# Altium PCB customPCB.PcbDoc
Units mil, origin at the board's own origin, x right, y up, seen from the top; angles counter-clockwise.
Board outline 3105.44 x 1253.03 mil, 2 copper layers (Top Layer, Bottom Layer); 62 components, 39 nets, 215 pads, 57 vias.
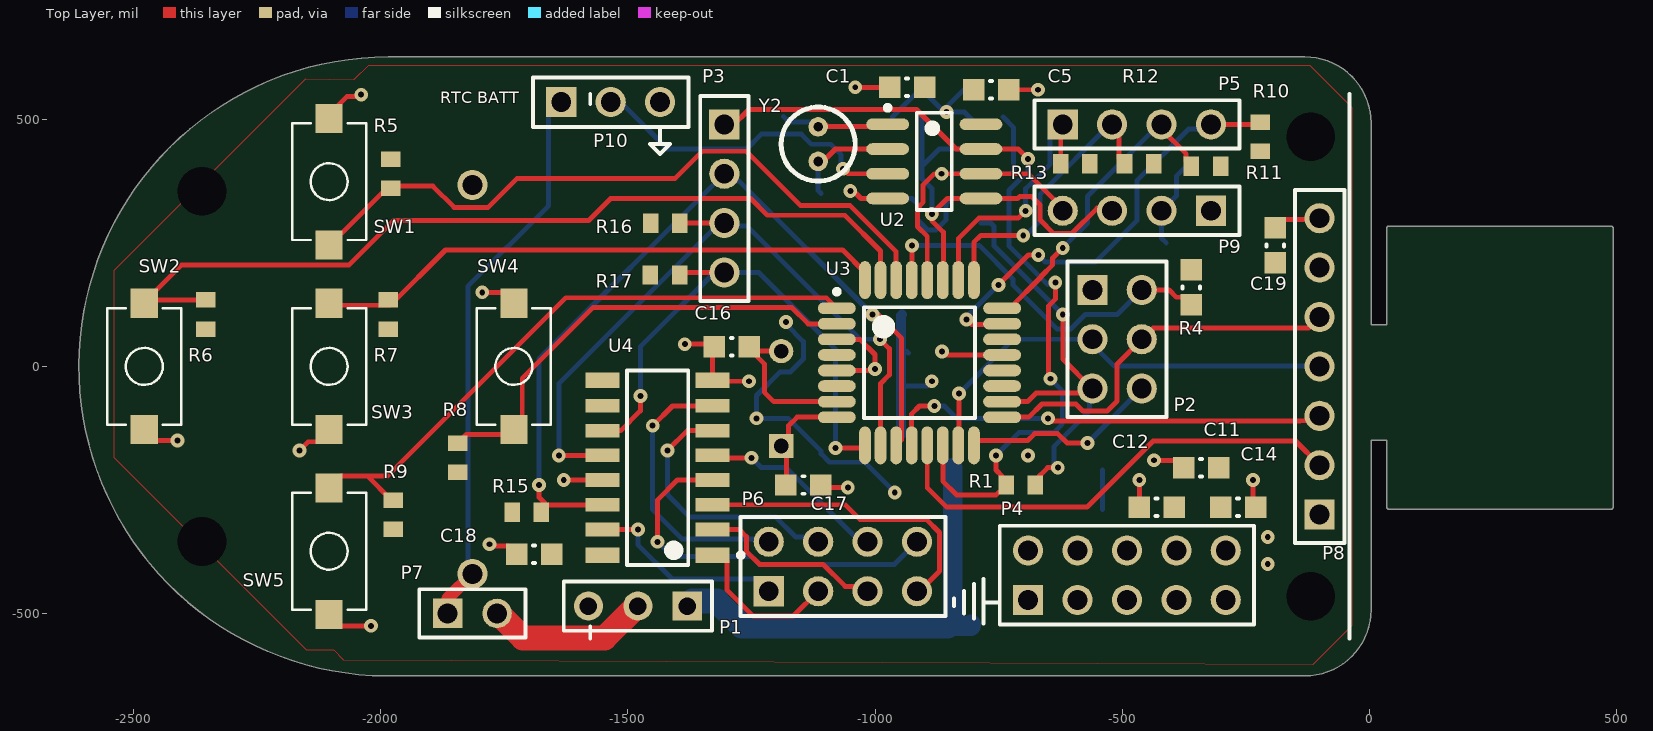
[diagram p0: Top Layer view]
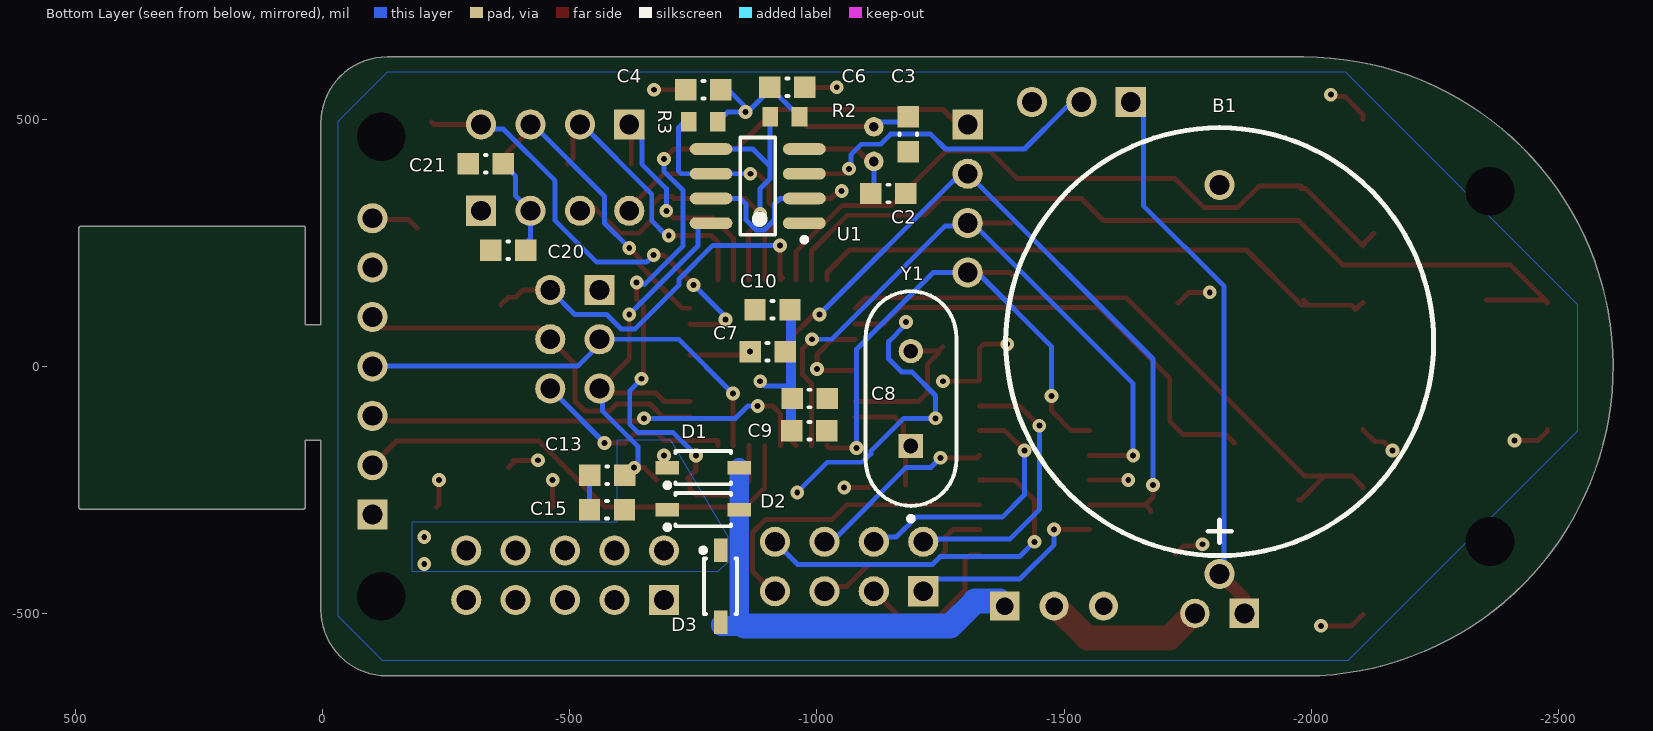
[diagram p1: Bottom Layer view, seen from below]

## Layer stack, top to bottom
Top Solder: solder mask 0.4, Solder Resist, Dk 3.5
Top Layer: signal copper 1.4
Dielectric 1: dielectric 12.6, FR-4, Dk 4.8
Bottom Layer: signal copper 1.4
Bottom Solder: solder mask 0.4, Solder Resist, Dk 3.5

## Board outline
-1990,-626.51 -130,-626.51 ccw(c-130,-622.5) -129.82,-626.51 ccw(c-130,-492.5) 4.01,-492.68 ccw(c0,-492.5) 4.02,-492.5 4.02,-149.02 35.98,-149.02 35.98,-285 ccw(c40,-285) 40,-289.01 490,-289.01 ccw(c490,-285) 494.02,-285 494.02,280 ccw(c490,280) 490,284.02 40,284.02 ccw(c40,280) 35.98,280 35.98,84.02 4.02,84.02 4.02,492.5 ccw(c0,492.5) 4.01,492.68 ccw(c-130,492.5) -129.82,626.51 ccw(c-130,622.5) -130,626.52 -1983.16,626.52 ccw(c-1983.16,622.5) -1984.05,626.42 ccw(c-1984.93,622.5) -1984.93,626.51 ccw(c-1984.93,0.01) -1990.59,-626.47 ccw(c-1990,-622.5)

## Design rules (kind name [scope] priority, off if disabled: settings)
Clearance [All] p1: gap=10 ignorepadtopadclearanceinfootprint=FALSE except(0: Arc-Hole Track-Hole SMDPad-Hole THPad-Hole Via-Hole Fill-Hole Poly-Hole Region-Hole Text-Hole; 2: Arc-SMDPad Track-SMDPad SMDPad-SMDPad)
HoleSize [All] p1: absolutevalues=TRUE maxlimit=100 minlimit=11.81 maxpercent=80.000 minpercent=20.000
PolygonConnect [All] p1: connectstyle=Direct reliefconductorwidth=10 reliefentries=4 polygonreliefangle="90 Angle" airgapwidth=10
RoomDefinition UI [InComponentClass('UI')] p1: confinementstyle=ConfineOut formatcopy=TRUE lockcomponents=FALSE outline 410,-3132.5 545,-3132.5 545,-2712.5 410,-2712.5
RoomDefinition Atmega328p_custom_board [InComponentClass('Atmega328p_custom_board')] p2: confinementstyle=ConfineOut formatcopy=TRUE lockcomponents=FALSE outline 95,-3532.5 440,-3532.5 440,-3112.5 95,-3112.5
RoutingVias [All] p1: holewidth=28 width=50 viastyle="Through Hole" minholewidth=11.81 minwidth=7.99 maxholewidth=28 maxwidth=50
SilkToSilkClearance [All] p1: silktosilkclearance=1.97
SilkToSolderMaskClearance [IsPad] p1: minsilkscreentomaskgap=3.94 clearancetoexposedcopper=TRUE
SolderMaskExpansion [All] p1: expansion=4
Width [All] p1: maxlimit=50 minlimit=10 preferedwidth=10 minimp=50.000000 maximp=50.000000 favimp=50.000000
27 further rules are at their usual default settings.

## Classes and differential pairs
component class UI: C18 C19 C20 C21 C? P8 P9 R5 R6 R7 R8 R9 R? SW1 SW2 SW3 SW4 SW5 SW?
component class Atmega328p_custom_board: B1 C1 C2 C3 C4 C5 C6 C7 C8 C9 C10 C11 C12 C13 C14 C15 C16 C17 C? D1 D2 D3 P1 P2 P3 P4 P5 P6 P7 P10 R1 R2 R3 R4 R10 R11 R12 R13 R15 R16 R17 R? U1 U2 U3 U4 U? Y1 Y2 Y?

## Components (designator, comment, footprint, x,y, rotation, side; value= is the part's Value field where it differs from the comment)
B1 "2032_holder" 2032_BATTERY_HOLDER -1815,-419.9 r90 bottom
C1 "1uF" CAPC0603(1608)100_M -935,565 r180 top value=20pF
C2 "20pF" CAPC0603(1608)100_M -1144.57,350 r180 bottom
C3 "20pF" CAPC0603(1608)100_M -1185,470 r270 bottom
C4 "1uF" CAPC0603(1608)100_M -770,560 r0 bottom value=20pF
C5 "0.1uF" CAPC0603(1608)100_M -765,560 r0 top value=20pF
C6 "0.1uF" CAPC0603(1608)100_M -940,565 r180 bottom value=20pF
C7 "0.1uF" CAPC0603(1608)100_M -900,30 r0 bottom value=20pF
C8 "0.1uF" CAPC0603(1608)100_M -985,-65 r180 bottom value=20pF
C9 "1uF" CAPC0603(1608)100_M -984.57,-130 r180 bottom value=20pF
C10 "1uF" CAPC0603(1608)100_M -910,115 r0 bottom value=20pF
C11 "0.1uF" CAPC0603(1608)100_M -340,-205 r180 top value=20pF
C12 "0.1uF" CAPC0603(1608)100_M -430,-285 r180 top value=20pF
C13 "1uF" CAPC0603(1608)100_M -575.43,-220 r0 bottom value=20pF
C14 "0.1uF" CAPC0603(1608)100_M -265,-285 r0 top value=20pF
C15 "1uF" CAPC0603(1608)100_M -575,-290 r0 bottom value=20pF
C16 "20pF" CAPC0603(1608)100_M -1290,40 r0 top
C17 "20pF" CAPC0603(1608)100_M -1145,-240 r180 top
C18 "0.1uF" CAPC0603(1608)100_M -1690,-380 r180 top value=20pF
C19 "1uF" CAPC0603(1608)100_M -190,245 r90 top value=20pF
C20 "0.1uF" CAPC0603(1608)100_M -375,235 r0 bottom value=20pF
C21 "1uF" CAPC0603(1608)100_M -329.57,410 r0 bottom value=20pF
D1 "1A" DIOD-SOD-123-2_V -770,-205 r0 bottom
D2 "1A" DIOD-SOD-123-2_V -770,-290 r0 bottom
D3 "1A" DIOD-SOD-123-2_V -805,-445 r90 bottom
P1 "Header 3" HDR1X3 -1380,-485 r180 top
P2 "TSW-103-08-F-D" SMTC-TSW-103-08-X-D -560,155 r270 top
P3 "HMTSW-104-23-F-S-237" SMTC-HMTSW-104-23-X-S-237 -1305,490 r270 top
P4 "MTSW-105-07-L-D-230" SMTC-MTSW-105-07-X-D-230 -690,-472.5 r0 top
P5 "HMTSW-104-23-F-S-237" SMTC-HMTSW-104-23-X-S-237 -620,490 r0 top
P6 "MTSW-104-12-F-D-006" SMTC-MTSW-104-12-X-D-006 -1215,-455 r0 top
P7 "MTLW-102-05-G-S-172" SMTC-MTLW-102-05-X-S-172 -1865,-500 r0 top
P8 "TSW-107-05-G-S" SMTC-TSW-107-05-X-S -100,-300 r90 top
P9 "HMTSW-104-23-F-S-237" SMTC-HMTSW-104-23-X-S-237 -320,315 r180 top
P10 "TSW-103-07-G-S" SMTC-TSW-103-07-X-S -1635,535 r0 top
R1 "4.7K" RESC1608X55X25ML10T15 -705,-240 r0 top
R2 "4.7K" RESC1608X55X25ML10T15 -935,505 r180 bottom
R3 "4.7K" RESC1608X55X25ML10T15 -769.53,495 r180 bottom
R4 "1K" RESC0603(1608)_M -360,160 r90 top value="1000.00 Ohm"
R5 "10K" RESC1608X55X25ML10T15 -1980,390 r90 top
R6 "10K" RESC1608X55X25ML10T15 -2355,105 r270 top
R7 "10K" RESC1608X55X25ML10T15 -1985,105 r270 top
R8 "10K" RESC1608X55X25ML10T15 -1845,-185 r270 top
R9 "10K" RESC1608X55X25ML10T15 -1975,-300 r270 top
R10 "4.7K" RESC1608X55X25ML10T15 -220,465 r90 top
R11 "4.7K" RESC1608X55X25ML10T15 -330,405 r180 top
R12 "4.7K" RESC1608X55X25ML10T15 -465.47,410 r180 top
R13 "4.7K" RESC1608X55X25ML10T15 -594.53,410 r180 top
R15 "4.7K" RESC1608X55X25ML10T15 -1705,-295 r0 top
R16 "4.7K" RESC1608X55X25ML10T15 -1424.53,290 r0 top
R17 "4.7K" RESC1608X55X25ML10T15 -1425,185 r0 top
SW1 "434121025816" 434121025816 -2105,374.02 r90 top
SW2 "434121025816" 434121025816 -2479.02,0 r90 top
SW3 "434121025816" 434121025816 -2105,0 r90 top
SW4 "434121025816" 434121025816 -1730.98,0 r90 top
SW5 "434121025816" 434121025816 -2105,-374.02 r90 top
U1 "24LC64F-I/SN" SOIC-SN8_N -880,365 r0 bottom
U2 "DS1307ZN/T&R" S8-2_N -880,415 r0 top
U3 "ATmega328P-AU" 32A_M -910,7.5 r0 top
U4 "74HC595D,112" FP-SOT109-1-MFG -1440,-205 r180 top
Y1 "16 MHz" ADAI-THHF-49S3 -1190,-65 r90 bottom
Y2 "32kHz_XTAL" 32kHz_XTAL -1115,450 r270 top

## Footprints (in the part's own frame and the unit in brackets; to place one, negate y for a bottom-side part, rotate by r counter-clockwise, add the part's x,y. Pads: shape width x height; smd on the part's side, far side on the other; paste and mask are expansions set on the pad)
32A_M [mm] "Thin QFP, 32-Leads, Body 7x7mm, Pitch 0.8mm, IPC Low Density"
  oval 1.95x0.6 smd: 1(-4.25,2.8) 2(-4.25,2) 3(-4.25,1.2) 4(-4.25,0.4) 5(-4.25,-0.4) 6(-4.25,-1.2) 7(-4.25,-2) 8(-4.25,-2.8) 17(4.25,-2.8) 18(4.25,-2) 19(4.25,-1.2) 20(4.25,-0.4) 21(4.25,0.4) 22(4.25,1.2) 23(4.25,2) 24(4.25,2.8)
  oval 0.6x1.95 smd: 9(-2.8,-4.25) 10(-2,-4.25) 11(-1.2,-4.25) 12(-0.4,-4.25) 13(0.4,-4.25) 14(1.2,-4.25) 15(2,-4.25) 16(2.8,-4.25) 25(2.8,4.25) 26(2,4.25) 27(1.2,4.25) 28(0.4,4.25) 29(-0.4,4.25) 30(-1.2,4.25) 31(-2,4.25) 32(-2.8,4.25)
  silkscreen extent -4.37,-2.85 2.85,3.77, body extent -3.5,-3.5 3.5,3.5, height 1.2
32kHz_XTAL [mm]
  round 1 hole 0.5: 0(-0.889,0) 1(0.889,0)
  silkscreen extent -1.9,-1.91 1.9,1.91
2032_BATTERY_HOLDER [mm]
  round 1.55 hole 1.02: 1(0,0) 2(20,0)
  silkscreen extent 0.94,-11 22.94,11, body extent -1.19,-11.12 23.11,11.18, height 8.5
434121025816 [mm] "6.0*3.8mm vertical type, SMD, height 2.5mm, black actuator, 160gf, T&R"
  rect 1.5x1.4 smd: 1(-3.25,0) 2(3.25,0)
  silkscreen extent -3,-1.9 3,1.9, body extent -3.65,-1.95 3.65,1.95, height 2.5
ADAI-THHF-49S3 [mm] "THD, 2-Leads, Body 11.05x4.65mm, Pitch 4.88mm"
  rect 1.25x1.25 hole 0.75: 1(-2.44,0)
  round 1.25 hole 0.75: 2(2.44,0)
  silkscreen extent -6.3,-2.34 5.52,2.33, body extent -5.53,-2.34 5.53,2.33, height 3.5
CAPC0603(1608)100_M [mm] "Chip Capacitor, Body 1.6x0.8mm, Height 1.0mm, IPC Low Density"
  rect 1.1x1.1 smd: 1(-0.9,0) 2(0.9,0)
  silkscreen extent -0.05,-0.45 0.05,0.45, body extent -0.87,-0.47 0.88,0.48, height 1
DIOD-SOD-123-2_V [mm] "SOD-123, 2-Leads, Body 2.85x1.7mm (max), Pitch 3.7mm"
  rect 1.2x0.7 smd: 1(-1.85,0) 2(1.85,0)
  silkscreen extent -1.43,-0.85 1.97,1.02, body extent -1.42,-0.85 1.43,0.85, height 1.45
FP-SOT109-1-MFG [mm]
  rect 1.75x0.8 smd paste-1000 mask+0: 1(-2.825,4.495) 8(-2.825,-4.495) 9(2.825,-4.495) 16(2.825,4.495)
  rect 1.75x0.7 smd paste-1000 mask+0: 2(-2.825,3.175) 3(-2.825,1.905) 4(-2.825,0.635) 5(-2.825,-0.635) 6(-2.825,-1.905) 7(-2.825,-3.175) 10(2.825,-3.175) 11(2.825,-1.905) 12(2.825,-0.635) 13(2.825,0.635) 14(2.825,1.905) 15(2.825,3.175)
  silkscreen extent -4.4,-5 1.58,5, body extent -3.83,-5.95 3.83,5.95, height 0.25
HDR1X3 [mm] "Connector; Header; 3 Position"
  rect 1.5x1.5 hole 0.9: 1(0,0)
  round 1.5 hole 0.9: 2(2.54,0) 3(5.08,0)
  silkscreen extent -1.27,-1.27 6.35,1.27
RESC0603(1608)_M [mm] "Chip Resistor, Body 1.6x0.8mm, IPC Low Density"
  rect 1.1x1.1 smd: 1(-0.9,0) 2(0.9,0)
  silkscreen extent -0.05,-0.45 0.05,0.45, body extent -0.85,-0.47 0.85,0.47, height 0.6
RESC1608X55X25ML10T15 [mm] "Chip Resistor, 2-Leads, Body 1.60x0.80mm, IPC Low Density"
  rect 0.8x1 smd: 1(-0.75,0) 2(0.75,0)
  body extent -0.85,-0.45 0.85,0.45, height 0.55
S8-2_N [mm] "SOIC, 8-Leads, Body 4.9x3.9mm, Pitch 1.27mm, IPC Medium Density"
  oval 2.2x0.6 smd: 1(-2.4,1.905) 2(-2.4,0.635) 3(-2.4,-0.635) 4(-2.4,-1.905) 5(2.4,-1.905) 6(2.4,-0.635) 7(2.4,0.635) 8(2.4,1.905)
  silkscreen extent -2.52,-2.5 0.9,2.88, body extent -2,-2.5 2,2.5, height 1.75
SMTC-HMTSW-104-23-X-S-237 [mm] "Terminal Strip, 1x2 Pins, Vertical, 2.54mm Pitch, Male"
  rect 1.55x1.55 hole 1.02: 1(0,0)
  round 1.55 hole 1.02: 2(2.54,0) 3(5.08,0) 4(7.62,0)
  silkscreen extent -1.46,-1.24 9.08,1.24, body extent -1.27,-1.27 8.89,1.27, height 8.56
SMTC-MTLW-102-05-X-S-172 [mm] "Terminal Assembly, 1x2 Pins, Vertical, 2.54mm Pitch, Male"
  rect 1.52x1.52 hole 1.02: 1(0,0)
  round 1.52 hole 1.02: 2(2.54,0)
  silkscreen extent -1.46,-1.24 4,1.24, body extent -1.27,-1.24 3.81,1.24, height 5.89
SMTC-MTSW-104-12-X-D-006 [mm] "Assembly .025\" [.64] SQ Post Terminal Strip, 2x4 Pins, Vertical, 2.54mm Pitch, Male"
  rect 1.55x1.55 hole 1.02: 1(0,0)
  round 1.55 hole 1.02: 2(0,2.54) 3(2.54,0) 4(2.54,2.54) 5(5.08,0) 6(5.08,2.54) 7(7.62,0) 8(7.62,2.54)
  silkscreen extent -1.46,-1.27 9.08,3.81, body extent -1.27,-1.27 8.89,3.81, height 2.69
SMTC-MTSW-105-07-X-D-230 [mm] "Assembly .025\" [.64] SQ Post Terminal Strip, 2x5 Pins, Vertical, 2.54mm Pitch, Male"
  rect 1.55x1.55 hole 1.02: 1(0,0)
  round 1.55 hole 1.02: 2(0,2.54) 3(2.54,0) 4(2.54,2.54) 5(5.08,0) 6(5.08,2.54) 7(7.62,0) 8(7.62,2.54) 9(10.16,0) 10(10.16,2.54)
  silkscreen extent -1.46,-1.27 11.62,3.81, body extent -1.27,-1.27 11.43,3.81, height 8.38
SMTC-TSW-103-07-X-S [mm] ".025 SQ Post Terminal Strip Assembly, 1x3 Pins, Vertical, 2.54mm Pitch, Male"
  rect 1.55x1.55 hole 1.02: 1(0,0)
  round 1.55 hole 1.02: 2(2.54,0) 3(5.08,0)
  silkscreen extent -1.46,-1.27 6.54,1.27, body extent -1.27,-1.27 6.35,1.27, height 8.38
SMTC-TSW-103-08-X-D [mm] ".025 SQ Post Terminal Strip Assembly, 2x3 Pins, Vertical, 2.54mm Pitch, Male"
  rect 1.55x1.55 hole 1.02: 1(0,0)
  round 1.55 hole 1.02: 2(0,2.54) 3(2.54,0) 4(2.54,2.54) 5(5.08,0) 6(5.08,2.54)
  silkscreen extent -1.46,-1.27 6.54,3.81, body extent -1.27,-1.27 6.35,3.81, height 8.38
SMTC-TSW-107-05-X-S [mm] ".025 SQ Post Terminal Strip Assembly, 1x7 Pins, Vertical, 2.54mm Pitch, Male"
  rect 1.55x1.55 hole 1.02: 1(0,0)
  round 1.55 hole 1.02: 2(2.54,0) 3(5.08,0) 4(7.62,0) 5(10.16,0) 6(12.7,0) 7(15.24,0)
  silkscreen extent -1.46,-1.27 16.7,1.27, body extent -1.27,-1.27 16.51,1.27, height 5.21
SOIC-SN8_N [mm] "SOIC, 8-Leads, Body 4.9x3.9mm, Pitch 1.27mm, IPC Medium Density"
  oval 2.2x0.6 smd: 1(-2.4,1.905) 2(-2.4,0.635) 3(-2.4,-0.635) 4(-2.4,-1.905) 5(2.4,-1.905) 6(2.4,-0.635) 7(2.4,0.635) 8(2.4,1.905)
  silkscreen extent -2.52,-2.5 0.9,2.88, body extent -2,-2.5 2,2.5, height 1.75

## Part data
C1 C2 C3 C4 C5 C6 C7 C8 C9 C10 C11 C12 C13 C14 C15 C16 C17 C18 C19 C20 C21: library part CMP-1035-00774-1, "CAP 20pF 25V ±0.25pF 0603 (1608 Metric) Thickness 1mm SMD", Case-EIA=0603, Case-Metric=1608, Rated Voltage="25 V", Tolerance=±0.25pF, Max Thickness="1 mm", Technology=SMT
D1 D2 D3: library part CMP-0303-00003-1, "1.0 A Surface Mount Schottky Barrier Rectifier, 40 V, -65 to 125 degC, 2-Pin SOD-123 Package, RoHS, Tape and Reel", @ Terminal Temperature TT (degC)=90, Forward Voltage Drop VF (V)=0.45, Manufacturer="Diodes Inc", Maximum Average Rectified Current IO (A)=1, Maximum Reverse Current IR (uA)=50, Operating and Storage Temperature Range="-65 to 125 degC", PartNumber=1N5819HW-7-F, Peak Forward Surge Current IFSM (A)=25, Peak Repetitive Reverse Voltage VRRM (V)=40, @ IF (A)=1, @ VR (V)=40, ComponentLink1Description="Manufacturer URL", ComponentLink1URL=http://www.diodes.com/, ComponentLink2Description=Datasheet, ComponentLink2URL=http://www.diodes.com/datasheets/ds30217.pdf, DatasheetVersion="Rev. 15-2", Mounting Technology="Surface Mount", PackageDescription="2-Pin SOD-123, Body 2.7 x 1.55 mm, Pitch 3.7 mm", PackageReference=SOD-123-2, Packing="Tape and Reel", RoHS=TRUE, Total Capacitance CT (pF)=50, VR (RMS) (V)=28
P1: "Header, 3-Pin", LatestRevisionDate=17-Jul-2002, LatestRevisionNote="Re-released for DXP Platform.", Publisher="Altium Limited"
P2: library part CMP-1024-00337-1, "0.025\" SQ Post Header, Through-hole, Vertical, -55 to 125 degC, 2.54 mm Pitch, 6-Pin, Male, RoHS", Manufacturer=Samtec, Temperature Range="-55 to 125 degC", ComponentLink1Description="Manufacturer URL", ComponentLink1URL=http://www.samtec.com, ComponentLink2Description=Datasheet, ComponentLink2URL=http://www.samtec.com/documents/webfiles/pdf/TSW_TH.PDF, ComponentLink3Description="Package Specification", ComponentLink3URL=http://www.samtec.com/documents/webfiles/cpdf/TSW-XXX-XX-XXX-X-XX-XXX-MKT.pdf, DatasheetVersion=F-214, Mounting Technology=Through-hole, Orientation=Vertical, PackageDescription=".025[0.64] SQ. Post Terminal Strip Assembly", PackageReference=TSW-103-08-X-D, PackageVersion="DM, 8/1988", PartNumber=TSW-103-08-F-D, Pitch="2.54 mm", RoHS=True
P3 P5 P9: library part CMP-1024-00021-1, "Modified .025\" SQ Post Header, Through-hole, Vertical, -55 to 125 degC, 2.54 mm Pitch, 4-Pin, Male, RoHS", Manufacturer=Samtec, Temperature Range="-55 to 125 degC", ComponentLink1Description="Manufacturer URL", ComponentLink1URL=http://www.samtec.com, ComponentLink2Description=Datasheet, ComponentLink2URL=http://www.samtec.com/documents/webfiles/pdf/HMTSW.PDF, ComponentLink3Description="Package Specification", ComponentLink3URL=http://www.samtec.com/documents/webfiles/cpdf/HMTSW-XXX-XX-X-X-XXXX-XX-XX-MKT1.pdf, DatasheetVersion=F-214, Mounting Technology=Through-hole, Orientation=Vertical, PackageDescription="Assembly .025 [.64] SQ. Post Hi-Temp Terminal Strip", PackageReference=HMTSW-104-23-X-S-237, PackageVersion="AL, 3/1987", PartNumber=HMTSW-104-23-F-S-237, Pitch="2.54 mm", RoHS=True
P4: library part CMP-1024-00115-1, "Modified .025\" SQ Post Header, Through-hole, Vertical, -55 to 125 degC, 2.54 mm Pitch, 10-Pin, Male, RoHS", Manufacturer=Samtec, Temperature Range="-55 to 125 degC", ComponentLink1Description="Manufacturer URL", ComponentLink1URL=http://www.samtec.com, ComponentLink2Description=Datasheet, ComponentLink2URL=http://www.samtec.com/documents/webfiles/pdf/MTSW.PDF, ComponentLink3Description="Package Specification", ComponentLink3URL=http://www.samtec.com/documents/webfiles/cpdf/MTSW-XXX-XX-X-X-XXXX-XX-XXX-MKT1.pdf, DatasheetVersion=F-214, Mounting Technology=Through-hole, Orientation=Vertical, PackageDescription="Assembly .025\" [.64] SQ Post Terminal Strip", PackageReference=MTSW-105-07-X-D-230, PackageVersion="BI, 2/1987", PartNumber=MTSW-105-07-L-D-230, Pitch="2.54 mm", RoHS=True
P6: library part CMP-1024-00109-1, "Modified .025\" SQ Post Header, Through-hole, Vertical, -55 to 125 degC, 2.54 mm Pitch, 8-Pin, Male, RoHS", Manufacturer=Samtec, Temperature Range="-55 to 125 degC", ComponentLink1Description="Manufacturer URL", ComponentLink1URL=http://www.samtec.com, ComponentLink2Description=Datasheet, ComponentLink2URL=http://www.samtec.com/documents/webfiles/pdf/MTSW.PDF, ComponentLink3Description="Package Specification", ComponentLink3URL=http://www.samtec.com/documents/webfiles/cpdf/MTSW-XXX-XX-X-X-XXXX-XX-XXX-MKT1.pdf, DatasheetVersion=F-214, Mounting Technology=Through-hole, Orientation=Vertical, PackageDescription="Assembly .025\" [.64] SQ Post Terminal Strip", PackageReference=MTSW-104-12-X-D-006, PackageVersion="BI, 2/1987", PartNumber=MTSW-104-12-F-D-006, Pitch="2.54 mm", RoHS=True
P7: library part CMP-1024-00064-1, "Low Profile .025\" SQ Post Header, Through-hole, Vertical, -55 to 125 degC, 2.54 mm Pitch, 2-Pin, Male, RoHS", Manufacturer=Samtec, Temperature Range="-55 to 125 degC", ComponentLink1Description="Manufacturer URL", ComponentLink1URL=http://www.samtec.com, ComponentLink2Description=Datasheet, ComponentLink2URL=http://www.samtec.com/documents/webfiles/pdf/MTLW_TH.PDF, ComponentLink3Description="Package Specification", ComponentLink3URL=http://www.samtec.com/documents/webfiles/cpdf/MTLW-1XX-XX-XX-X-XXX-XX-XX-MKT1.pdf, DatasheetVersion=F-214, Mounting Technology=Through-hole, Orientation=Vertical, PackageDescription="Low Profile Terminal Assembly", PackageReference=MTLW-102-05-X-S-172, PackageVersion="T, 6/1991", PartNumber=MTLW-102-05-G-S-172, Pitch="2.54 mm", RoHS=True
P8: library part CMP-1024-00400-1, "0.025\" SQ Post Header, Through-hole, Vertical, -55 to 125 degC, 2.54 mm Pitch, 7-Pin, Male, RoHS", Manufacturer=Samtec, Temperature Range="-55 to 125 degC", ComponentLink1Description="Manufacturer URL", ComponentLink1URL=http://www.samtec.com, ComponentLink2Description=Datasheet, ComponentLink2URL=http://www.samtec.com/documents/webfiles/pdf/TSW_TH.PDF, ComponentLink3Description="Package Specification", ComponentLink3URL=http://www.samtec.com/documents/webfiles/cpdf/TSW-XXX-XX-XXX-X-XX-XXX-MKT.pdf, DatasheetVersion=F-214, Mounting Technology=Through-hole, Orientation=Vertical, PackageDescription=".025[0.64] SQ. Post Terminal Strip Assembly", PackageReference=TSW-107-05-X-S, PackageVersion="DM, 8/1988", PartNumber=TSW-107-05-G-S, Pitch="2.54 mm", RoHS=True
P10: library part CMP-1024-00333-1, "0.025\" SQ Post Header, Through-hole, Vertical, -55 to 125 degC, 2.54 mm Pitch, 3-Pin, Male, RoHS", Manufacturer=Samtec, Temperature Range="-55 to 125 degC", ComponentLink1Description="Manufacturer URL", ComponentLink1URL=http://www.samtec.com, ComponentLink2Description=Datasheet, ComponentLink2URL=http://www.samtec.com/documents/webfiles/pdf/TSW_TH.PDF, ComponentLink3Description="Package Specification", ComponentLink3URL=http://www.samtec.com/documents/webfiles/cpdf/TSW-XXX-XX-XXX-X-XX-XXX-MKT.pdf, DatasheetVersion=F-214, Mounting Technology=Through-hole, Orientation=Vertical, PackageDescription=".025[0.64] SQ. Post Terminal Strip Assembly", PackageReference=TSW-103-07-X-S, PackageVersion="DM, 8/1988", PartNumber=TSW-103-07-G-S, Pitch="2.54 mm", RoHS=True
R1 R2 R3 R5 R6 R7 R8 R9 R10 R11 R12 R13 R15 R16 R17: library part CMP-2000-05024-1, "Chip Resistor, 4.7 KOhm, +/- 5%, 100 mW, -55 to 155 degC, 0603 (1608 Metric), RoHS, Tape and Reel", Case Code - in=0603, Case Code - mm=1608, Manufacturer=Yageo, Operating Temperature Range=-55Cto+155C, Package Description="2-Pin Surface Mount Device, Body 1.6 x 0.8 mm", Package Reference=603, Power Rating=100mW, Resistance=4.7kOhms, Temperature Coefficient=100PPM/C, Tolerance=5%, Voltage Rating=50V, Datasheet URL=http://www.yageo.com/documents/recent/PYu-RC_Group_51_RoHS_L_04.pdf, Datasheet Version="Rev. 4, 02/2016", Manufacturer URL=http://www.yageo.com/, Packaging=Reel, Product=ThickFilmResistorsGeneralPurpose, Series=RC, Termination Style=SMD/SMT
R4: library part CMP-1012-00510-1, "1K 0.1W 1% 0603 (1608 Metric)  SMD", Case-EIA=0603, Case-Metric=1608, Power="0.1 W", Tolerance="1 %", Technology=SMT
SW1 SW2 SW3 SW4 SW5: library part CMP-1459-00004-1, "WS-TASV SMD Tact Switch 6.0X3.8 mm", Manufacturer="Wuerth Elektronik", ComponentLink1Description="Manufacturer URL", ComponentLink1URL=http://www.we-online.com, ComponentLink2Description=Datasheet, ComponentLink2URL=http://katalog.we-online.de/em/datasheet/434121025816.pdf, NoPins=02, PackageReference=434121025816, PartNumber=434121025816
U1: library part CMP-0159-00258-1, "64Kbit, 400kHz, 2.5V, I2C Serial EEPROM, 8-Pin SOIC 150mil, Industrial Temperature", Code_IPC=SOIC127P600-8, Code_JEDEC=MS-012, DatasheetVersion="revA, May-2009", PackageDescription="8-Lead Plastic Small Outline (SN) - Narrow, 3.90mm Body [SOIC]", PackageReference=SOIC-SN8, PackageVersion="revBB, Aug-2009"
U2: library part CMP-0254-00304-1, "64 x 8, Serial, I2C Real-Time Clock, 5.0V, 8-Pin SO, -40 to 85 degC, Reel", Code_IPC=SOIC127P600-8, Code_JEDEC=MS-012-AA, ComponentLink1Description="Manufacturer URL", ComponentLink1URL=http://www.maxim-ic.com, ComponentLink2Description=Datasheet, ComponentLink2URL=http://datasheets.maxim-ic.com/en/ds/DS1307.pdf, ComponentLink3Description="Package Specification", ComponentLink3URL=http://pdfserv.maxim-ic.com/package_dwgs/21-0041.PDF, DatasheetVersion=10-Feb-2008, PackageDescription="8-Pin Small-Outline IC, Narrow (0.15in), 1.27 mm Pitch, SOIC (N)", PackageReference=S8-2, PackageVersion="revC, 2010"
U3: library part CMP-0095-00269-1, "8-bit AVR Microcontroller, 32KB Flash, 1KB EEPROM, 2KB SRAM, 32-pin TQFP, Industrial Grade (-40°C to 85°C)", Code_JEDEC=MS-026-ABA, DatasheetVersion="revA, Jan-2010", PackageDescription="32-Lead, 7x7x1.0 mm Body, 0.8mm Lead Pitch, Thin Profile Plastic Quad Flat Package (TQFP)", PackageReference=32A, PackageVersion="revB, Oct-2001"
U4: library part CMP-14351-000003-1, "IC SHIFT REGISTER 8BIT 16SOIC", Ambient Temperature Range High=+125°C, Ambient Temperature Range Low=-40°C, Frequency=108MHz, Manufacturer=Nexperia, Max Supply Voltage=6V, Min Supply Voltage=2V, Nominal Supply Current=70mA, Package=SOT109-1, Temperature="-40°C to +125°C", Automotive=No, Category=IC, ComponentLink2Description=Datasheet, ComponentLink2URL=https://assets.nexperia.com/documents/data-sheet/74HC_HCT595.pdf, Device Class L1="Integrated Circuits (ICs)", Device Class L2="Logic ICs", Device Class L3="Shift Registers", Digikey Description="IC SHIFT REGISTER 8BIT 16SOIC", Footprint Url=https://assets.nexperia.com/documents/outline-drawing/SOT109-1.pdf, Height=1.75mm, Lead Free=Yes, Manufacturer Part Number=74HC595D,112, Mouser Description="74HC(T)595 - 8-bit serial-in, serial or parallel-out shift register with output latches; 3-state", Number Of Circuits=1, Number Of Inputs=1, Number Of Outputs=8, Octopart=https://octopart.com/74hc595d%2C112-nexperia-78737374, Propagation Delay=16ns, RoHS=TRUE, Standoff Height=0.1mm, Temperature Range High=+125°C, Temperature Range Low=-40°C
Y1: library part CMP-1740-00002-1, "Crystal, 16 MHz, 18 pF, 30 ppm, -20 to 70 degC, 2-Pin THD, RoHS", Case\Package=Radial, Colour=Green, Forward Current="30 mA", Forward Voltage="2.6 V", Max Operating Temperature="100 degC", Min Operating Temperature="-55 degC", Package Quantity=1000, ComponentLink1Description="Manufacturer URL", ComponentLink1URL=https://www.adafruit.com/, ComponentLink2Description=Datasheet, ComponentLink2URL=https://cdn-shop.adafruit.com/product-files/2215/2215datasheet.pdf, DatasheetVersion=Nov-14, Height="5.2 mm", Illumination Colour=Green, Length="3.8 mm", Lens Style=Dome, Luminous Intensity="12.6 mcd", Mount="Through Hole", Nominal Vf="2.1 V", PackageDescription="2-Pin Through Hole Device, Body 11.05 x 4.65 mm, Pitch 4.88 mm", PackageReference=THHF-49S3, Packaging=Bulk, Pins=2, Radiation Hardening=No, RoHSCompliant=true, Viewing Angle="60 degrees"
B1: datasheet=http://www.memoryprotectiondevices.com/datasheets/BS-7-BLUE-datasheet.pdf

## Free pads (board coordinates)
  round 60 hole 98.43: 2(-2362.2,-354.33) 2(-2362.2,354.33) 2(-118.11,-465.04) 2(-118.11,465.04)

## Via types
v1: diameter 28, hole 12, Top Layer to Bottom Layer, 57 vias

## Nets (pads, with @x,y where several pads share a name; then routed paths per layer and width w, separated by ;. In a path a pad name is that pad's centre, name@x,y a point inside that pad or via, vN(x,y) a via of type N, cw(c..) or ccw(c..) an arc to the next point about the centre after c; other vN are vias at no path point)
D5: P3.4 R17.2 U3.9 U4.11 | length 1098.6
  Top Layer w10: U4.11 -1515,-130 -1475,-90 v1(-1475,-60) ; R17.2 -1390.47,190 P3.4 ; v1(-1080,-165) -1025.41,-165 U3.9
  Bottom Layer w10: v1(-1475,-60) -1475,40 -1325,190 P3.4 -1235,190 -1080,35 v1(-1080,-165)
D6: P3.3 R16.2 U3.10 U4.12 | length 1443.3
  Top Layer w10: v1@-1645,-175 v1(-1640,-180) U4.12 ; R16.2 P3.3 P3.3@-1304.69,289.69 ; v1(-990,55) -971,36 -971,-17.01 -988.74,-34.75 U3.10
  Bottom Layer w10: v1(-1640,-180) -1640,-35 -1315,290 P3.3 -1299.49,284.49 -1259.49,284.49 -1030,55 v1(-990,55)
D7: P3.2 R15.2 U3.11 U4.14 | length 1796.5
  Top Layer w10: v1(-1680,-240) -1680,-265.04 -1665.04,-280 U4.14 -1551.54,-280.31 -1664.72,-280.31 -1675.47,-291.06 R15.2 ; v1(-1005,105) -993.99,105 -946,57.01 -946,-148.58 U3.11
  Bottom Layer w10: v1(-1680,-240) -1680,15 P3.2 -1290,375 -1275,375 v1(-1005,105)
D8: P8.3 U3.12 | length 910.2
  Top Layer w10: U3.12 -925.75,-95.75 -910,-80 v1(-880,-80) ; v1(-650,-105) -644.49,-110.51 -139.49,-110.51 -140,-110 P8.3@-100,-110
  Bottom Layer w10: v1(-880,-80) -860,-80 -835,-105 v1(-650,-105)
D9: P8.2 U3.13 | length 972.2
  Top Layer w10: U3.13 -894.25,-245.75 -855,-285 -571.01,-285 -437.01,-151 -149,-151 P8.2
D11: P2.3 P8.4 U3.15 | length 903.7
  Top Layer w10: U3.15 -830,-158.56 v1(-830,-55)
  Bottom Layer w10: v1(-830,-55) -720,55 -570,55 -515.51,0.51 -100.51,0.51 P8.4
D13: P2.4 P8.5 U3.17 | length 782.6
  Top Layer w10: U3.17 -688.75,-102.74 -662.01,-76 -593.36,-76 -578.85,-90.51 -530.51,-90.51 -510,-70 -510,5 P2.4 -437.5,77.5 -122.5,77.5 P8.5
DOWN: R9.1 SW5.2 U3.1 | length 1270.3
  Top Layer w10: SW5.2 -2105,-244.09 -2082.44,-221.54 -2027.87,-221.54 ; R9.1 -1978.94,-270.47 -2027.87,-221.54 ; U3.1 -1098.59,139 -1626,139 -1986.54,-221.54 -2027.87,-221.54
ENTER: R7.1 SW3.2 U3.32 | length 1192.9
  Top Layer w10: SW3.2 -2105,129.92 -2090.04,114.96 -2090.04,116.18 -2082.44,123.78 R7.1@-1995.75,123.78 ; R7.1 R7.1@-1995.75,123.78 ; U3.32 -1020.24,190.24 -1065.51,235.51 -1869.49,235.51 -1981.22,123.78 R7.1@-1995.75,123.78
GND: B1.2 C1.2 C2.2 C3.2 C4.2 C5.2 C6.2 C7.2 C8.2 C9.2 C10.2 C11.2 C12.2 C13.2 C14.2 C15.2 C16.1 C17.1 C18.2 C19.2 C20.2 C21.2 P2.1 P4.1 P4.3 P4.5 P4.7 P4.9 P8.7 P9.1 P10.3 SW1.2 SW2.1 SW3.1 SW4.2 SW5.1 U1.1 U1.2 U1.3 U1.4 U1.7 U2.4 U3.3 U3.5 U3.21 U4.8 U4.13 | length 2102.7
  Top Layer w10: SW2.1 -2479.02,-129.92 -2458.94,-150 v1(-2411.89,-150) ; v1(-2165,-170) -2147.5,-152.5 -2129.55,-152.5 SW3.1 ; SW5.1 -2105,-502.44 -2082.44,-525 v1(-2020,-525) ; SW1.2@-2105,500.01 SW1.2 -2105,510 -2068.44,546.56 -2043.44,546.56 v1(-2040,550) ; v1(-1795,150) -1753.03,150 SW4.2 ; v1(-1780,-360) -1776.65,-363.35 -1742.09,-363.35 C18.2 ; v1(-1630,-230) U4.13 ; v1(-1385,45) -1337.13,45 -1328.78,36.65 U4.8 -1326.81,-30 v1(-1255,-30) ; C17.1 -1104.57,-245 v1(-1055,-245) ; U3.5 -1003.25,-8.25 v1(-1000,-5) -1000,23.99 -1030.76,54.74 U3.3 ; v1(-1050,355) -1043.43,355 -1028.43,340 U2.4 ; v1(-1040,565) C1.2@-980.43,565 ; C1.2 C1.2@-975.22,569.78 ; v1(-864.57,30) -857.82,23.25 U3.21 ; C5.2 v1(-670,560) ; P2.1@-580,175 P2.1 ; C12.2 -465,-284.57 v1(-465,-230) ; v1(-435,-190) -385,-190 -387.72,-192.72 C11.2 ; v1(-235,-230) -235,-279.57 C14.2 ; C19.2 -173.35,297.09 -102.91,297.09 P8.7 ; C1.2@-980.43,565 -980.43,575 C1.2@-975.22,569.78 ; C1.2@-980.43,565 -980.43,549.57 -965,565 -965,580 C1.2@-975.22,569.78 ; C1.2@-980.43,565 -980,565 C1.2@-975.22,569.78
  Bottom Layer w10: U1.2 -925,340 -914,329 -914,296.74 -893.26,276 -876.74,276 -856,296.74 -856,329 -845,340 U1.7 ; C15.2 C13.2@-539.57,-210
LEFT: R6.1 SW2.2 U3.31 | length 1808.9
  Top Layer w10: R6.1 -2472.44,134.53 SW2.2 -2479.02,129.92 -2403.94,205 -2065,205 -1975,295 -1580,295 -1535,340 -1251.83,340 -1217.83,306 -1061,306 -988.74,233.74 U3.31
MISO: P2.6 U3.16 | length 417.6
  Top Layer w10: U3.16 -799.76,-150 -691.01,-150 -677.01,-136 -630.14,-136 -611.14,-155 v1(-570,-155) ; P2.6@-460,-60 P2.6
  Bottom Layer w10: v1(-570,-155) -475,-60 P2.6@-460,-60
NetC2_1: C2.1 U2.2 Y2.1 | length 226.9
  Top Layer w10: Y2.1@-1115,405 -1080,440 -1054.49,440 ; -1050,440 -1054.49,440 ; U2.2 -1054.49,440
  Bottom Layer w10: Y2.1 -1115,355.87 C2.1
NetC3_1: C3.1 U2.1 Y2.0 | length 206.8
  Top Layer w10: Y2.0@-1100,490 -1096,486 -979,486 U2.1@-975,490
  Bottom Layer w10: C3.1 -1174.57,495 -1125,495 Y2.0
NetC16_2: C16.2 U3.7 Y1.2 | length 314.9
  Top Layer w10: C16.2 C16.2@-1245.63,31.06 ; Y1.2 C16.2@-1245.63,31.06 ; U3.7 -1204.77,-71.24 -1224,-52.01 -1224,5.06 -1245.63,26.69 C16.2@-1245.63,31.06
NetC17_2: C17.2 U3.8 Y1.1 | length 227.1
  Top Layer w10: C17.2@-1179.57,-240 -1179.57,-165.06 -1180,-164.63 -1175,-159.63 -1175,-120 -1157.74,-102.74 U3.8
NetP1_2: P1.2 P7.2 | length 332.2
  Top Layer w50: P7.2 -1762.34,-500 -1712.81,-549.53 -1546.98,-549.53 -1482.45,-485 P1.2
NetP5_1: P5.1 R13.2 U3.26 | length 531.2
  Top Layer w10: U3.26 -831.26,258.74 -790,300 -710,300 v1(-695,315) ; R13.2 -624.06,485.94 P5.1
  Bottom Layer w10: v1(-695,315) -695,359.94 -645.51,409.42 -645.51,464.49 P5.1
NetP5_2: P5.2 R12.2 U3.25 | length 577.3
  Top Layer w10: U3.25 -799.76,251.25 -786.01,265 v1(-700,265) ; P5.2 -520,476.19 -505.75,461.94 -505.75,420.75 R12.2
  Bottom Layer w10: v1(-700,265) -695,265 -665.51,294.49 -665.51,348.85 -524.36,490 P5.2
NetP5_3: P5.3 R11.2 U3.24 | length 627.5
  Top Layer w10: U3.24 -727.39,117.74 -664,181.13 -664,182.01 -640.49,205.52 -640.49,219.51 v1(-620,240) ; P5.3 -420,480 -370.28,430.28 -370.28,415.75 R11.2
  Bottom Layer w10: v1(-620,240) -570,290 -570,344.36 -424.36,490 P5.3
NetP5_4: P5.4 R10.2 U3.23 | length 899.7
  Top Layer w10: v1(-815,95) -805,85 -743.92,85 U3.23 ; v1(-750,165) -689.49,225.51 v1(-669.49,225.51) ; P5.4 -224.53,490 R10.2
  Bottom Layer w10: v1(-815,95) -815,100 v1(-750,165) ; v1(-669.49,225.51) -654.99,211 -554,211 -470,295 -470,375.64 -365.4,480.24 -329.76,480.24 P5.4
NetP6_1: P6.1 U4.15 | length 406.2
  Top Layer w10: U4.15 v1(-1480,-330)
  Bottom Layer w10: v1(-1480,-330) -1480,-361.01 -1411.01,-430 -1240,-430 P6.1
NetP6_2: P6.2 U4.7 | length 569.7
  Top Layer w10: v1(-1450,-120) -1410,-80 U4.7
  Bottom Layer w10: v1(-1450,-120) -1450,-290 -1390.44,-349.56 -1220.44,-349.56 P6.2
NetP6_3: P6.3 U4.1 | length 320.7
  Top Layer w10: U4.1 -1310.08,-381.97 -1299.33,-392.72 -1299.33,-452.91 -1247.24,-505 -1165,-505 P6.3
NetP6_4: P6.4 U4.6 | length 542.1
  Top Layer w10: v1(-1420,-170) -1380,-130 U4.6
  Bottom Layer w10: v1(-1420,-170) -1420,-260 -1375,-305 -1200.64,-305 -1160.4,-345.24 -1124.76,-345.24 P6.4
NetP6_5: P6.5 U4.2 | length 382.8
  Top Layer w10: U4.2 -1275,-330 -1260.51,-344.49 -1260.51,-373.85 -1233.85,-400.51 -1105.12,-400.51 -1060.4,-445.24 -1024.76,-445.24 P6.5
NetP6_6: P6.6 U4.5 | length 386.3
  Top Layer w10: U4.5 -1323.78,-185 v1(-1250,-185)
  Bottom Layer w10: v1(-1250,-185) -1230.77,-204.23 -1180.77,-204.23 -1039.76,-345.24 -1024.76,-345.24 P6.6
NetP6_7: P6.7 U4.3 | length 623.2
  Top Layer w10: U4.3 -1060,-280 -1030.51,-309.49 -896.15,-309.49 -869.49,-336.15 -869.49,-414.49 -910,-455 P6.7
NetP6_8: P6.8 U4.4 | length 775.5
  Top Layer w10: v1(-1440,-355) -1440,-270 -1400,-230 U4.4
  Bottom Layer w10: v1(-1440,-355) -1410,-385 -1249.36,-385 -1233.85,-400.51 -960.51,-400.51 P6.8
NetP10_2: P10.2 U2.3 | length 660.1
  Top Layer w10: v1(-1065,400) -1055,390 U2.3
  Bottom Layer w10: P10.2 -1525.24,525.24 -1505.24,525.24 -1420,440 -1260,440 -1230,470 -1149.05,470 -1128.74,449.69 -1089.69,449.69 -1068.44,428.44 -1068.44,403.44 v1(-1065,400)
RESET: P2.2 R4.1 U3.29 | length 761.4
  Top Layer w10: U3.29 -930,179.07 -925,184.07 v1(-925,245) ; P2.2 -405,155 -390,140 -375.43,140 R4.1
  Bottom Layer w10: v1(-925,245) -788.99,245 -721,177.01 -721,164.99 -632.01,76 -603.36,76 -574.36,105 -510,105 P2.2
RIGHT: R8.1 SW4.1 U3.2 | length 945.9
  Top Layer w10: R8.1 -1826.97,-137.44 -1740.47,-137.44 SW4.1 -1714,-110.97 -1714,-24 -1571,119 -1167.99,119 -1135.23,86.24 U3.2
SCL: P9.4 R3.1 U1.6 U2.6 U3.28 | length 788.1
  Top Layer w10: U3.28 -894.25,263.24 -914,282.99 -914,320.76 -902.5,332.26 -902.5,367.5 -880,390 v1(-865,390) U2.6 -690,390 -630,330 P9.4@-620,330
  Bottom Layer w10: v1(-865,390) U1.6 -725,390 -720,395 -720,483.99 R3.1@-741.01,505
SDA: P9.3 R2.1 U1.5 U2.5 U3.27 | length 931.5
  Top Layer w10: v1@-875.76,308.75 v1(-885,308.75) ; U3.27 -861.74,175.84 -861.74,271.74 -885,295 v1(-885,308.75) ; P9.3@-529.76,320.24 -550.4,320.24 -601.15,269.49 -638.85,269.49 -666,296.64 -666,327.01 -682.99,344 -707.01,344 -711.01,340 U2.5 -853.75,340 v1(-885,308.75)
  Bottom Layer w10: R2.1 -905,504.53 -905,405 ; v1(-885,308.75) -885,360 -905,380 -905,405 ; U1.5 -870,440 -905,405
SQW: P3.1 R1.1 U2.7 U3.14 | length 1747.5
  Top Layer w10: P3.1 -1290,475 -1290,485 -1255,520 -916.01,520 -836.01,440 U2.7 -710,440 v1(-690,420) ; U3.14 -862.76,-232.24 -835,-260 -754.53,-260 -742.56,-248.03 R1.1@-742.56,-221.97 ; v1(-755,-180) -755,-209.53 R1.1@-742.56,-221.97 ; R1.1@-737.56,-226.97 R1.1@-742.56,-221.97 ; v1(-645,-25) -649,-21 -649,122.01 -635,136.01 v1(-635,170)
  Bottom Layer w10: -745,-170 -709,-134 -637.99,-134 -621,-117.01 -621,-49 v1(-645,-25) ; v1(-690,420) -690,395 -729,356 -729,244 -725,240 -650.29,165.29 -645.57,170 v1(-635,170)
UP: R5.1 SW1.1 U3.30 | length 1436.9
  Top Layer w10: SW1.1@-2127.56,269.25 -2105,246.69 SW1.1 -2105,244.1 -1988.63,360.47 R5.1 ; R5.1@-1980,365 -1895,365 -1851.99,321.99 -1783.01,321.99 -1725,380 -1405,380 -1349.49,435.51 -1260.51,435.51 -1151,326 -1051,326 -957.24,232.24 U3.30
VBAT: B1.1 P7.1 P10.1 | length 1137.7
  Top Layer w25: P7.1 -1865,-469.9 B1.1
  Bottom Layer w10: B1.1 -1824,-410.9 -1824,162.01 -1660.51,325.5 -1660.51,509.49 P10.1
VCC: C1.1 C4.1 C5.1 C6.1 C7.1 C8.1 C9.1 C10.1 C11.1 C12.1 C13.1 C14.1 C15.1 C18.1 C19.1 C20.1 C21.1 D1.2 D2.2 D3.2 P2.5 P4.2 P4.4 P4.6 P4.8 P4.10 P8.1 P8.6 P9.2 R1.2 R2.2 R3.2 R4.2 R5.2 R6.2 R7.2 R8.2 R9.2 R10.1 R11.1 R12.1 R13.1 R15.1 R16.1 R17.1 U1.8 U2.8 U3.4 U3.6 U3.18 U4.10 U4.16 | length 2289.1
  Top Layer w10: U3.18 -691.24,-71.24 -674,-54 -569,-54 P2.5 -620,15 v1(-620,105) ; R1.2@-675.47,-230 -650.47,-205 v1(-630,-205)
  Bottom Layer w10: v1(-1180,90) -1180,85 -1145,50 -1145,15 -1171,-11 -1192.01,-11 -1240,-58.99 v1(-1240,-105) -1175.64,-105 -1109,-171.64 -1109,-177.01 -1092.01,-194 -1021,-194 v1(-960,-255) ; R2.2 C6.1 ; C8.1 C8.1@-947.07,-62.5 ; C9.1 C9.1@-947.07,-127.93 ; -947.07,-39.71 -894.71,-39.71 v1(-885,-30) ; C7.1 C7.1@-932.5,27.07 ; C6.1@-905,560 -860,515 v1(-855,515) ; C4.1@-820.43,560 -855,525.43 v1(-855,515) ; R3.2 -819.06,515 v1(-855,515) ; U1.8 -765.31,290 -759.02,283.71 -759.02,244.02 v1(-620,105) ; v1(-630,-205) -630,-214.3 -637.52,-206.78 -637.52,-161.82 -566.22,-90.51 -566.22,-51.22 P2.5 ; C20.1@-410.43,250 -420,259.57 P9.2 -390,345 -390,385 C21.1
  Bottom Layer w20: -947.5,-39.71 -947.5,102.93 C10.1@-945.43,105 ; C9.1@-947.07,-122.93 -947.07,-62.5 -947.07,-39.71 ; C9.1@-946.63,-137.93 C9.1@-946.63,-127.93
  other v1: -205,-400 -205,-345 -690,-180
Vin: D1.1 D2.1 D3.1 P1.1 | length 927.6
  Bottom Layer w40: P1.1 P1.1@-1370,-475 ; D1.1 D2.1 -842.83,-515.85 -852.5,-525.51 -806.22,-525.51 -805,-524.29 D3.1@-805,-521.73
  Bottom Layer w50: P1.1@-1370,-475 -1320,-475 -1269.49,-525.51 -852.5,-525.51
pads on no net: P1.3 U3.19 U3.20 U3.22 U4.9

## Polygon pours and split planes (outlines as drawn)
VCC on Top Layer "Top Layer-VCC" (solid, shelved, pour order 8): -2075.05,-594.88 -2094.93,-575 -2150,-575 -2540,-185 -2540,195 -2152.5,582.5 -2055,580 -2025,610 -120,610 -35,525 -35,-525.05 -114.35,-604.02
GND on Bottom Layer "Bottom Layer-GND" (solid, shelved, pour order 6): -130,595 -30,495 -30,-505 -120,-595 -2075,-595 -2540,-130 -2540,125 -2070,595
VCC on Bottom Layer "Bottom Layer-NetC11_1" (solid, shelved, pour order 4): -180,-315 -180,-415 -190,-415 -800,-415 -820,-395 -820,-345 -703.63,-149.02 -595,-149.02 -595,-315

## Silkscreen, mask and mechanical layers (free items; w line width, h text height)
Top Overlay:
  lines w8: -1576.38,-551.18 -1576.38,-526.38 ; -1576.38,531.38 -1576.38,551.18 ; -1435,485 -1435,450 ; -839.98,-485 -839.98,-470 ; -819.98,-500 -819.98,-455 ; -799.98,-510 -799.98,-440 ; -779.98,-520 -779.98,-430 ; -779.98,-477.5 -750,-477.5 ; -40,-551.18 -40,551.18 ; -1435,450 -1455,450 -1435,430 -1415,450 -1435,450
  text "RTC BATT" at -1880,525 h40
Mechanical 1:
  lines w7.99: -1984.93,-622.49 cw(c-1984.93,0.01) -1984.93,622.5 ; -130,-622.5 ccw(c-130,-492.5) 0,-492.5 ; -130,622.5 cw(c-130,492.5) 0,492.5
  lines w8: -1990,-622.5 -130,-622.5 ; -1983.16,622.5 -130,622.5 ; 0,-492.5 0,-145 ; 0,492.5 0,80 40,80 40,280 490,280 490,-285 40,-285 40,-145 0,-145 ; 35,-145 0,-145
Mechanical 13:
  lines w7.99: -1984.93,-622.49 cw(c-1984.93,0.01) -1984.93,622.5 ; -130,-622.5 ccw(c-130,-492.5) 0,-492.5 ; -130,622.5 cw(c-130,492.5) 0,492.5
  lines w8: -1990,-622.5 -130,-622.5 ; -1983.16,622.5 -130,622.5 ; 0,-492.5 0,-145 ; 0,492.5 0,80 40,80 40,280 490,280 490,-285 40,-285 40,-145 0,-145 ; 35,-145 0,-145

## Panel: embedded boards
"..\..\mutual_cap\Software_power_module\power_button_module.PcbDoc" at 40,-285, 1 rows x 1 columns, spacing 2500 x 1500, rotation 0